# Altium PCB 5VV10 AND BUCK.PcbDoc
Units mil, origin at the board's own origin, x right, y up, seen from the top; angles counter-clockwise.
Board outline 4440.01 x 4440.01 mil, 2 copper layers (Top Layer, Bottom Layer); 24 components, 23 nets, 89 pads, 22 vias.
Unrouted connection lines stored in the file: 1.
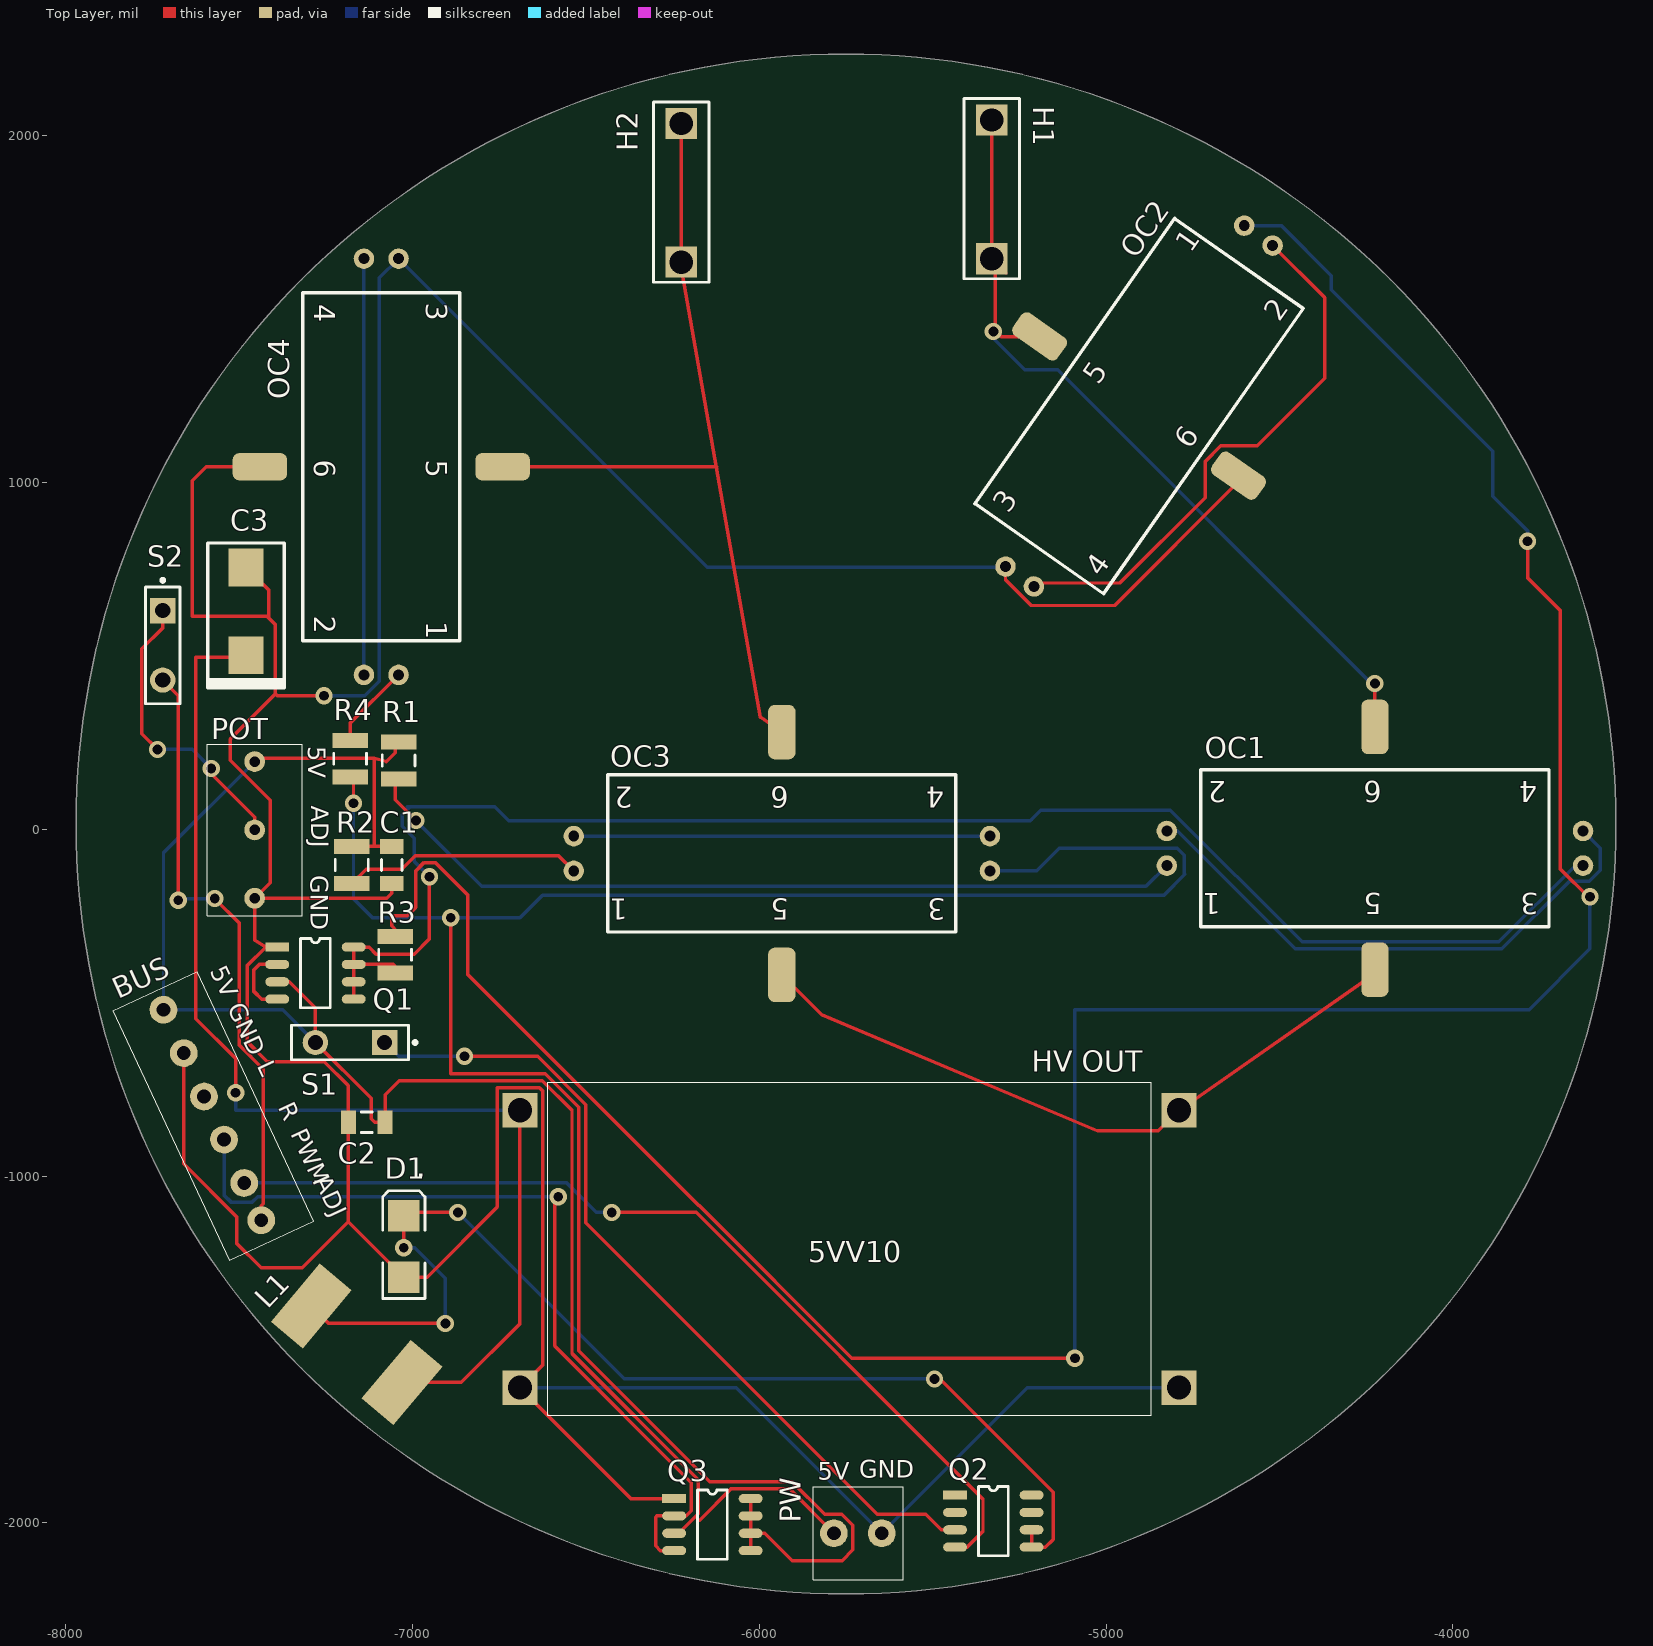
[diagram p0: Top Layer view]
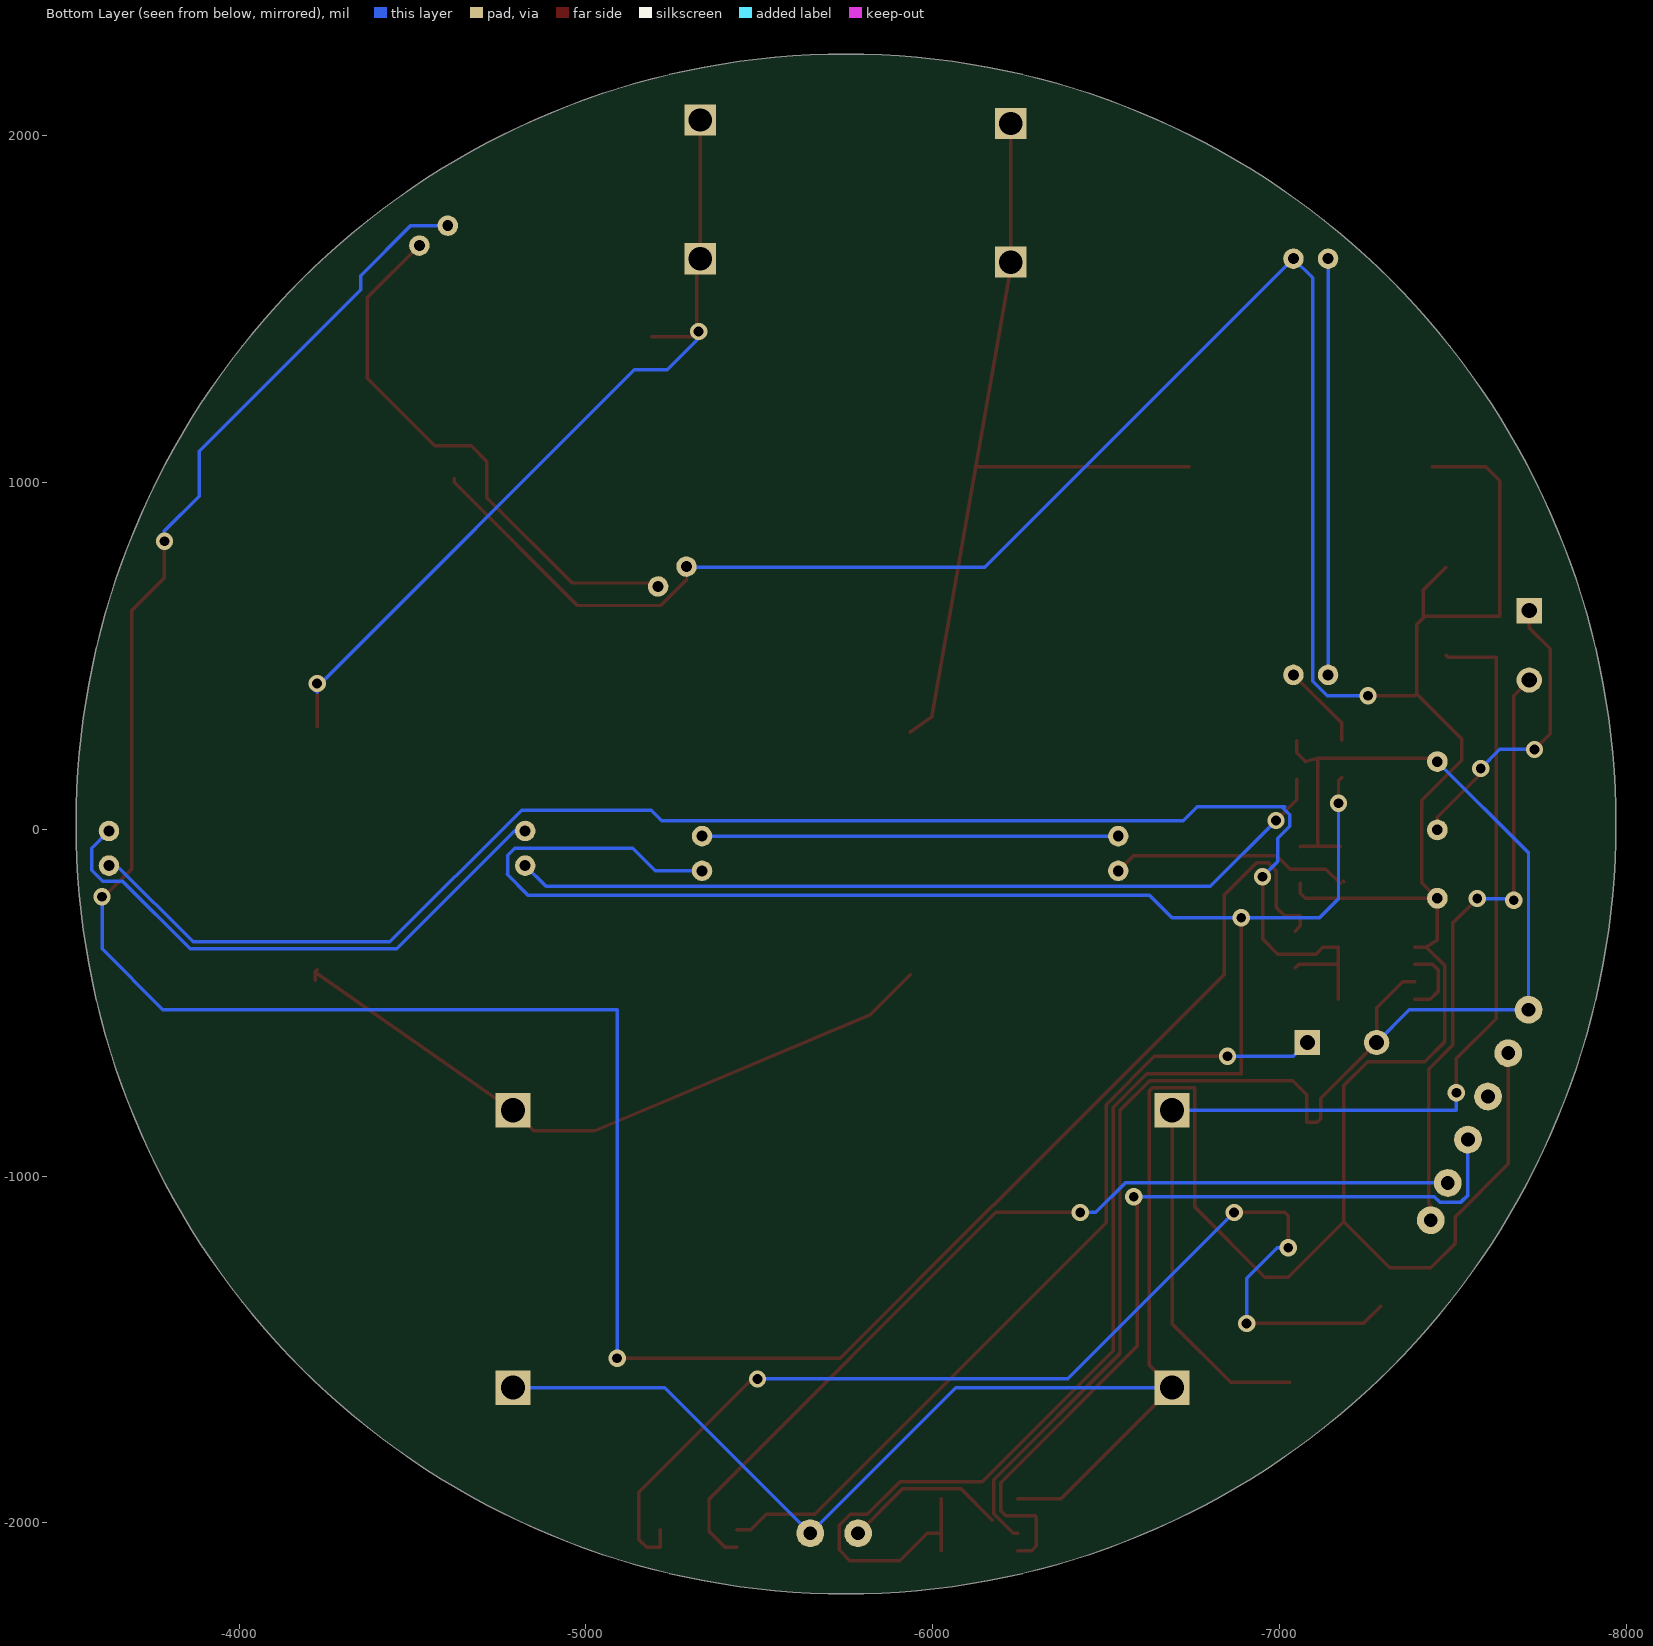
[diagram p1: Bottom Layer view, seen from below]

## Layer stack, top to bottom
Top Solder: solder mask 0.4, Solder Resist, Dk 3.5
Top Layer: signal copper 1.4
Dielectric 1: dielectric 12.6, FR-4, Dk 4.8
Bottom Layer: signal copper 1.4
Bottom Solder: solder mask 0.4, Solder Resist, Dk 3.5

## Board outline
-7970.01,15 ccw(c-5750,15) -5750,-2205.01 ccw(c-5750,15) -3529.99,15 ccw(c-5750,15) -5750,2235.01 ccw(c-5750,15)

## Design rules (kind name [scope] priority, off if disabled: settings)
Clearance [All] p1: gap=10 ignorepadtopadclearanceinfootprint=FALSE except(0: Arc-Hole Track-Hole SMDPad-Hole THPad-Hole Via-Hole Fill-Hole Poly-Hole Region-Hole Text-Hole)
PolygonConnect [All] p1: connectstyle=Relief reliefconductorwidth=10 reliefentries=4 polygonreliefangle="90 Angle" airgapwidth=10
RoutingVias [All] p1: holewidth=28 width=50 viastyle="Through Hole" minholewidth=28 minwidth=50 maxholewidth=28 maxwidth=50
SolderMaskExpansion [All] p1: expansion=4
Width [All] p1: maxlimit=10 minlimit=10 preferedwidth=10
30 further rules are at their usual default settings.

## Classes and differential pairs
component class "5VV10 AND BUCK": BUS C1 C2 C3 D1 H1 H2 "HV OUT" L1 OC1 OC2 OC3 OC4 POT PW Q1 Q2 Q3 S1 S2

## Components (designator, comment, footprint, x,y, rotation, side; value= is the part's Value field where it differs from the comment)
BUS "BUS" WJ350_6_Pins -7717.86,-520.62 r205 top
C1 "Cap Semi" C1206 -7060,-103.15 r90 top value=100pF
C2 "Cap Semi" C1206 -7131.85,-845 r180 top value=100pF
C3 "Capacitor 220uF (Polarized)" "SMD 7343 - Pol" -7480,628.23 r270 top value=220uF
D1 "D Schottky" SMB -7025,-1203.58 r90 top
H1 "2mm Banana" PCBComponent_1#1 -5330,1645 r0 top
H2 "2mm Banana" PCBComponent_1#1 -6225,1635 r0 top
"HV OUT" "5VV10" PCBComponent_1#2 -6690,-810 r270 top
L1 "Inductor" PCBComponent_1#3 -7291.99,-1375.17 r230 top value=820uH
OC1 "Optocoupler" OC100G -4225,-55 r270 top
OC2 "Optocoupler" OC100G -4905,1220 r145 top
OC3 "Optocoupler" OC100G -5935,-70 r270 top
OC4 "Optocoupler" OC100G -7090,1045 r0 top
POT "POT" WJ350_3_Pins -7455,195 r180 top
PW "PW" WJ350_2_Pins -5785,-2030 r270 top
Q1 "Dual MOSFET" SO-8 -7390,-340 r0 top
Q2 "Dual MOSFET" SO-8 -5435.47,-1920 r0 top
Q3 "Dual MOSFET" SO-8 -6245.47,-1930 r0 top
R1 "Res3" 14-1210 -7040,198.15 r90 top value=27
R2 "Res3" 14-1210 -7175,-103.15 r90 top value=27
R3 "Res3" 14-1210 -7050,-361.85 r270 top value=27
R4 "Res3" 14-1210 -7180,203.15 r270 top value=27
S1 "SW-PB" SPST-2 -7180,-615 r180 top
S2 "SW-PB" SPST-2 -7720,530 r270 top

## Footprints (in the part's own frame and the unit in brackets; to place one, negate y for a bottom-side part, rotate by r counter-clockwise, add the part's x,y. Pads: shape width x height; smd on the part's side, far side on the other; paste and mask are expansions set on the pad)
14-1210 [mm] "Chip Resistor, Body 3.2x2.5mm, IPC High Density"
  rect 1.1x2.6 smd: 1(-1.35,0) 2(1.35,0)
  silkscreen extent -0.4,-1.2 0.4,1.2, body extent -1.68,-1.32 1.68,1.32, height 0.9
C1206 [mm] "Chip Capacitor, Body 3.2x1.6mm, IPC High Density"
  rect 1.1x1.7 smd: 1(-1.35,0) 2(1.35,0)
  silkscreen extent -0.4,-0.75 0.4,0.75, body extent -1.7,-0.9 1.7,0.9, height 1.3
OC100G [mm]
  round 1.5 hole 0.8: 1(1.27,-15.24) 2(-1.27,-15.24) 3(1.27,15.24) 4(-1.27,15.24)
  rrect50% 4x2 smd: 5(8.89,0) 6(-8.89,0)
  silkscreen extent -5.75,-12.75 5.75,12.75
PCBComponent_1#1 [mil]
  rect 90x90 hole 67: 1(0,0) 1(0,400)
  silkscreen extent -80,-58 80,462
PCBComponent_1#2 [mil]
  rect 100x100 hole 70: 1(0,0) 2(800,0) 3(800,1900) 4(0,1900)
  silkscreen extent -80,80 880,1820
PCBComponent_1#3 [mil]
  rect 220x120 smd: 1(0,0) 2(0,342)
SMB [mm] "DO-214-AA/SMB; 2 C-Bend Leads; Body 5.3 x 3.6 mm, inc. leads (LxW)"
  rect 2.3x2.3 smd: 1(-2.25,0) 2(2.25,0)
  silkscreen extent -3.8,-1.55 4.1,1.55
"SMD 7343 - Pol" [mm]
  rect 2.77x2.55 smd: 1(3.22,0) 2(-3.22,0)
  silkscreen extent -5,-2.8 5.6,2.8
SO-8 [mm]
  rect 1.75x0.67 smd: 1(0,0)
  oval 1.75x0.67 smd: 2(0,-1.27) 3(0,-2.54) 4(0,-3.81) 5(5.6,-3.81) 6(5.6,-2.54) 7(5.6,-1.27) 8(5.6,0)
  silkscreen extent 1.71,-4.44 3.89,0.64
SPST-2 [mm] "Switch; 2 Leads"
  rect 1.85x1.85 hole 1.1: 1(-2.54,0)
  round 1.85 hole 1.1: 2(2.54,0)
  silkscreen extent -4.89,-1.27 4.28,1.27
WJ350_2_Pins [mil]
  round 80 hole 40: P1(0,0) P2(0,138)
  silkscreen extent -134,-60 134,200
WJ350_3_Pins [mil]
  round 60 hole 30: P1(0,0) P2(0,197) P3(0,394)
  silkscreen extent -137,-50 137,445
WJ350_6_Pins [mil]
  round 80 hole 40: P1(0,0) P2(0,138) P3(0,276) P4(0,413) P5(0,551) P6(1,669)
  silkscreen extent -134,-59 134,735

## Part data
BUS: library part WJ350_6_Pins
C1 C2: "Capacitor (Semiconductor SIM Model)", LatestRevisionDate=29-May-2009, LatestRevisionNote="IPC-7351 Footprint Added.", PackageDescription="Chip Capacitor", PackageReference=C1206, Published=8-Jun-2000, Publisher="Altium Limited"
D1: "Schottky Diode", Code_JEDEC=DO-214-AA, LatestRevisionDate=17-Jul-2002, LatestRevisionNote="Re-released for DXP Platform.", PackageDescription="DO-214-AA/SMB; 2 C-Bend Leads; Body 5.3 x 3.6 mm, inc. leads (LxW)", PackageReference=SMB, Published=8-Jun-2000, Publisher="Altium Limited"
L1: library part 820u
OC1 OC2 OC3 OC4: "Manufacturer OC100G MPI distribution OC100G"
POT: library part WJ350_3_Pins
PW: library part WJ350_2_Pins
Q1 Q2 Q3: "Manufacturer FDS8858CZ Farnell 1498963"
R1 R2 R3 R4: "Resistor", LatestRevisionDate=29-May-2009, LatestRevisionNote="IPC-7351 Footprint Added.", PackageDescription="Chip Resistor", PackageReference=J1-0603, Published=8-Jun-2000, Publisher="Altium Limited"
S1 S2: "Switch", LatestRevisionDate=17-Jul-2002, LatestRevisionNote="Re-released for DXP Platform.", PackageDescription="Switch; 2 Leads", PackageReference=SPST-2, Published=24-Mar-1999, Publisher="Altium Limited"
C3: LatestRevisionDate=17-Jul-2002, LatestRevisionNote="Re-released for DXP Platform.", PackageDescription="Polarized Capacitor (Radial); 2 Leads", PackageReference=RB7.6-15, Published=8-Jun-2000, Publisher="Altium Limited"
"HV OUT": Mnf="Pico Electronics"

## Via types
v1: diameter 50, hole 28, Top Layer to Bottom Layer, 22 vias

## Nets (pads, with @x,y where several pads share a name; then routed paths per layer and width w, separated by ;. In a path a pad name is that pad's centre, name@x,y a point inside that pad or via, vN(x,y) a via of type N, cw(c..) or ccw(c..) an arc to the next point about the centre after c; other vN are vias at no path point)
5V: BUS.P1 C1.2 C2.1 POT.P1 PW.P1 Q1.3 Q3.3 R1.2 R2.2 S1.2 | length 5250.1
  Top Layer w10: POT.P1@-7455,205 -7110,205 ; Q1.3 -7355,-440 -7280,-515 S1.2 -7119,-776 -7119,-835 -7109,-845 C2.1 -7078.7,-765.7 -7038,-725 -6625.5,-725 -6540,-810.5 -6540,-1511.72 -6176,-1875.72 -6176,-1973.28 -6232.72,-2030 Q3.3 ; R2.2 -7173.81,-48.81 -7110,-48.81 ; C1.2 -7061.19,-48.81 -7110,-48.81 ; R1.2@-7050,255 -7050,220 -7075,195 -7110,205 ; -6172,-1992 -6081,-1901 -5914,-1901 PW.P1 ; -7110,-48.81 -7110,205
  Bottom Layer w10: POT.P1 -7717.86,-67.86 BUS.P1 -7374.38,-520.62 S1.2
ADJ: BUS.P6 S2.2 | length 1748.6
  Top Layer w10: S2.2 -7675,385 v1(-7675,-205) ; v1(-7570,-200) -7500,-270 -7500,-622 -7430,-692 -7430,-1080 -7436.04,-1086.04 BUS.P6
  Bottom Layer w10: v1(-7675,-205) -7670,-200 v1(-7570,-200)
GND: "HV OUT.2" "HV OUT.3" BUS.P2 C1.1 C2.2 C3.2 D1.1 OC2.3 OC2.6 OC4.3 OC4.6 POT.P3 PW.P2 Q1.1 Q3.1 | length 13944
  Top Layer w10: BUS.P2 -7659.54,-965 -7506,-1118.54 -7506,-1195 -7436,-1265 -7317.84,-1265 -7185,-1132.16 ; C3.2 -7415,690 -7415,610 ; OC4.6 -7595,1045 -7635,1005 -7635,613.8 -7418.8,613.8 -7415,610 ; Q1.1 Q1.1@-7423,-340 ; v1(-7255,385) -7390,385 -7395,390 ; C1.1 -7060,-185 -7074,-199 POT.P3 ; Q3.1 -6370,-1930 -6690,-1610 -6625,-1545 -6625,-753.79 -6633.79,-745 -6755,-745 -6755,-1089.25 -6957.92,-1292.16 D1.1 -7185,-1132.16 ; OC2.3@-5290.1,755 -5290.1,718.77 -5216.33,645 -4975,645 -4620,1000 OC2.6@-4620,1010 ; POT.P3 -7455,-320 Q1.1@-7423,-340 ; POT.P3 -7410,-154 -7410,84 -7525,199 -7525,260 -7395,390 ; Q1.1@-7423,-340 -7477,-394 -7477,-612 -7419,-670 -7254,-670 -7185,-739 C2.2 -7185,-1132.16 ; -7415,610 -7395,590 -7395,390
  Bottom Layer w10: v1(-7255,385) -7137.03,385 -7095.47,426.56 -7095.47,1589.53 OC4.3 -6150,755 OC2.3@-5290.1,755 ; -6690,-1610 -6067,-1610 PW.P2 -5227,-1610 -4790,-1610
HV: "HV OUT.4" OC1.5 OC3.5 | length 2008.6
  Top Layer w10: OC3.5 -5820,-535 -5024.38,-870 -4850,-870 -4793.49,-813.49 ; -4790,-810 -4793.49,-813.49 ; OC1.5@-4227.15,-416.93 -4789.51,-810.7 -4793.49,-813.49 ; OC1.5 -4220,-410 OC1.5@-4220,-435
LEFT: Q1.2 Q1.4 | length 212.3
  Top Layer w10: Q1.4 -7435,-490 -7457,-468 -7457,-405 -7442,-390 Q1.2
NetC3_1: "HV OUT.1" C3.1 L1.2 | length 3347.2
  Top Layer w10: v1(-7510,-760) -7510,-661 -7625,-546 -7625,496.46 -7485,496.46 C3.1 ; L1.2 -6859,-1595 -6690,-1426 -6690,-810
  Bottom Layer w10: v1(-7510,-760) -7510,-810 -6690,-810
NetD1_2: D1.2 L1.1 Q2.5 Q2.6 | length 3253.6
  Top Layer w10: L1.1 -7242.15,-1425 v1(-6905,-1425) ; v1(-7025,-1207) D1.2 -7015,-1105 v1(-6869,-1105) ; v1(-5495,-1585) -5480,-1585 -5153,-1912 -5153,-2048 -5175,-2070 Q2.5 Q2.6
  Bottom Layer w10: v1(-7025,-1207) -6993,-1207 -6905,-1295 v1(-6905,-1425) ; v1(-6869,-1105) -6389,-1585 v1(-5495,-1585)
NetH1_1: H1.1 OC1.6 OC2.5 | length 2508.6
  Top Layer w10: H1.1@-5330,2045 -5330,1645 H1.1@-5320,1635 ; v1(-5325,1435) v1@-5320,1430 ; H1.1@-5290,1605 H1.1@-5320,1635 ; OC2.5@-5190,1420 -5301.25,1420 v1@-5320,1430 ; OC1.6 v1(-4225,420) ; v1@-5320,1430 H1.1@-5320,1635
  Bottom Layer w10: v1(-5325,1435) -5325,1415 -5235,1325 -5140,1325 v1@-4225,410 ; v1(-4225,420) v1@-4225,410 ; v1@-4225,410 -4225,395 -4217.5,402.5 v1@-4225,410
NetH2_1: H2.1 OC3.6 OC4.5 | length 2417
  Top Layer w10: OC4.5 -6123.92,1045 ; H2.1@-6226.54,1626.99 -6123.92,1045 ; H2.1@-6225,1635 H2.1@-6225,2035 ; -6122.15,1045 -6123.92,1045 ; OC3.6 -5996.64,323.16 -6123.92,1045
NetOC1_1: OC1.1 R1.1 | length 2413.2
  Top Layer w10: R1.1@-7050,144.76 -7050,85 v1(-6990,25)
  Bottom Layer w10: v1(-6990,25) -6800,-165 -4885,-165 OC1.1
NetOC1_2: OC1.2 OC1.4 | length 1618.6
  Bottom Layer w10: OC1.2 -4795,-5 -4455,-345 -3859.46,-345 -3663.99,-149.53 -3606.56,-149.53 -3575,-117.97 -3575,-55 OC1.4
NetOC1_3: OC1.3 Q1.5 Q1.6 Q1.7 Q1.8 R3.2 | length 4619.9
  Top Layer w10: Q1.5 Q1.6 Q1.7 ; R3.2@-7045,-400 -7055,-390 Q1.7 ; v1(-6951,-137) -6951,-316 -6995,-360 -7105,-360 -7125,-340 Q1.8 Q1.7
  Bottom Layer w10: v1(-6951,-137) -6995,-93 -6995,-26.57 -7030,8.43 -7030,41.57 -7010.78,60.78 -7015,65 -6763,65 -6722.53,24.53 -5218.45,24.53 ; -5215,27.97 -5218.45,24.53 ; OC1.3 -3647.74,-105 -3867.74,-325 -4435,-325 -4815,55 -5187.97,55 -5218.45,24.53
NetOC2_1: OC2.1 R3.1 | length 8000.6
  Top Layer w10: R3.1@-7045,-293.7 -7060,-278.7 -7060,-249.76 -7015,-249.76 -6991,-225.76 -6991,-120.43 -6966.69,-96.12 -6933.88,-96.12 -6840,-190 -6840,-420 -6175,-1085 -6173.34,-1085 -5733.34,-1525 v1(-5090,-1525) ; v1(-3785,830) -3785,725 -3690,630 -3690,-115 -3607.5,-197.5 v1(-3605,-195)
  Bottom Layer w10: v1(-5090,-1525) -5090,-520 -3780,-520 -3605,-345 v1(-3605,-195) ; OC2.1 -4494.28,1740.17 -4350.37,1596.26 -4350.37,1555.37 -3885,1090 -3885,960 -3785,860 v1(-3785,830)
NetOC2_2: OC2.2 OC2.4 | length 1578.6
  Top Layer w10: OC2.4@-5198.19,709.83 -4960.17,709.83 -4713.95,956.05 -4713.95,1060.27 -4668.99,1105.23 -4564.77,1105.23 -4370,1300 -4370,1532.92 OC2.2
NetOC3_1: OC3.1 R2.1 | length 693.2
  Top Layer w10: R2.1@-7185,-151.3 R2.1@-7183.7,-150 ; R2.1 -7133.7,-115 -7031,-115 -6992.12,-76.12 -6578.88,-76.12 OC3.1
NetOC3_2: OC3.2 OC3.4 | length 1200
  Bottom Layer w10: OC3.2 OC3.4
NetOC3_3: OC3.3 Q3.5 Q3.6 Q3.7 Q3.8 R4.2 | length 6600.8
  Top Layer w10: R4.2 -7170,140 v1(-7170,75) ; v1(-6890,-255) -6890,-705 -6617.22,-705 -6520,-802.22 -6520,-1503.43 -6142.43,-1881 -5905.72,-1881 -5811.72,-1975 -5762.22,-1975 -5730,-2007.22 -5730,-2078 -5761,-2109 -5905,-2109 -5984,-2030 Q3.6 ; Q3.5 Q3.6 ; Q3.8 Q3.7 Q3.6
  Bottom Layer w10: v1(-7170,75) -7170,-201 -7115,-256 -7114,-255 v1(-6890,-255) -6690,-255 -6625,-190 -4833,-190 -4773,-130 -4775,-130 -4775,-75 -4795,-55 -5135,-55 -5200,-120 OC3.3
NetOC4_1: OC4.1 R4.1 | length 246.7
  Top Layer w10: R4.1 -7180,305 OC4.1
NetOC4_2: OC4.2 OC4.4 | length 1200
  Bottom Layer w10: OC4.2 OC4.4
NetPOT_P2: POT.P2 S2.1 | length 850.1
  Top Layer w10: v1(-7735,230) -7780,275 -7780,520 -7720,580 S2.1 ; v1(-7580,175) -7580,160 -7455,35 POT.P2
  Bottom Layer w10: v1(-7735,230) -7635,230 v1(-7580,175)
NetQ2_3: Q2.3 S1.1 | length 2426.3
  Top Layer w10: v1(-6850,-655) -6638.93,-655 -6500,-793.93 -6500,-1135 -5660,-1975 -5520,-1975 -5475,-2020 Q2.3
  Bottom Layer w10: S1.1 -7040,-655 v1(-6850,-655)
PWM: BUS.P5 Q2.4 | length 2699.5
  Top Layer w10: v1(-6425,-1105) -6181.62,-1105 -5355,-1931.62 -5355,-2024 -5401,-2070 Q2.4
  Bottom Layer w10: BUS.P5 -6555,-1020 -6470,-1105 v1(-6425,-1105)
RIGHT: BUS.P4 Q3.2 Q3.4 | length 2468.3
  Top Layer w10: v1(-6580,-1060) -6590,-1060 -6590,-1490 -6196,-1884 -6196,-1965 -6211,-1980 Q3.2 -6295,-1980 -6299,-1984 -6299,-2066 -6285,-2080 Q3.4
  Bottom Layer w10: BUS.P4 -7543.32,-1055 -7523.32,-1075 -7461.45,-1075 -7446.45,-1060 v1(-6580,-1060)
pads on no net: BUS.P3 Q2.1 Q2.2 Q2.7 Q2.8

## Silkscreen, mask and mechanical layers (free items; w line width, h text height)
Top Overlay:
  text "." at -6970,-1010 h60 r90
Mechanical 13:
  circle w10: c-5750,15 r2220.01

## Text inside footprints (layer, text, board x,y; h text height)
BUS: Top Overlay "5V" at -7584.14,-407.51 h50 r295; Top Overlay "GND" at -7534.27,-514.46 h50 r295; Top Overlay "L" at -7448.47,-681.88 h50 r295; Top Overlay "R" at -7389.12,-802.06 h50 r295; Top Overlay "PWM" at -7352.29,-878.67 h50 r295; Top Overlay "ADJ" at -7282.62,-1013.9 h50 r295
OC1: Top Overlay "4" at -3756.5,137.91 h60 r180; Top Overlay "3" at -3752.56,-184.92 h60 r180; Top Overlay "6" at -4205.32,137.91 h60 r180; Top Overlay "5" at -4205.32,-184.92 h60 r180; Top Overlay "2" at -4654.13,137.91 h60 r180; Top Overlay "1" at -4669.88,-184.92 h60 r180
OC2: Top Overlay "4" at -5015.7,725.57 h60 r55; Top Overlay "3" at -5282.41,907.52 h60 r55; Top Overlay "6" at -4758.27,1093.22 h60 r55; Top Overlay "5" at -5022.72,1278.39 h60 r55; Top Overlay "2" at -4500.83,1460.88 h60 r55; Top Overlay "1" at -4756.25,1658.95 h60 r55
OC3: Top Overlay "4" at -5466.5,122.91 h60 r180; Top Overlay "3" at -5462.56,-199.92 h60 r180; Top Overlay "6" at -5915.32,122.91 h60 r180; Top Overlay "5" at -5915.32,-199.92 h60 r180; Top Overlay "2" at -6364.13,122.91 h60 r180; Top Overlay "1" at -6379.88,-199.92 h60 r180
OC4: Top Overlay "4" at -7282.91,1513.5 h60 r270; Top Overlay "3" at -6960.08,1517.44 h60 r270; Top Overlay "6" at -7282.91,1064.68 h60 r270; Top Overlay "5" at -6960.08,1064.68 h60 r270; Top Overlay "2" at -7282.91,615.87 h60 r270; Top Overlay "1" at -6960.08,600.12 h60 r270
POT: Top Overlay "ADJ" at -7292,67 h50 r270; Top Overlay "GND" at -7293,-133 h50 r270; Top Overlay "5V" at -7300,239 h50 r270
PW: Top Overlay "5V" at -5832,-1875 h50; Top Overlay "GND" at -5712,-1870 h50